# Altium PCB 主控A.PcbDoc
Units mm, origin at the board's own origin, x right, y up, seen from the top; angles counter-clockwise.
Board outline 114 x 43.69 mm, 2 copper layers (Top Layer, Bottom Layer); 97 components, 145 nets, 423 pads, 135 vias.
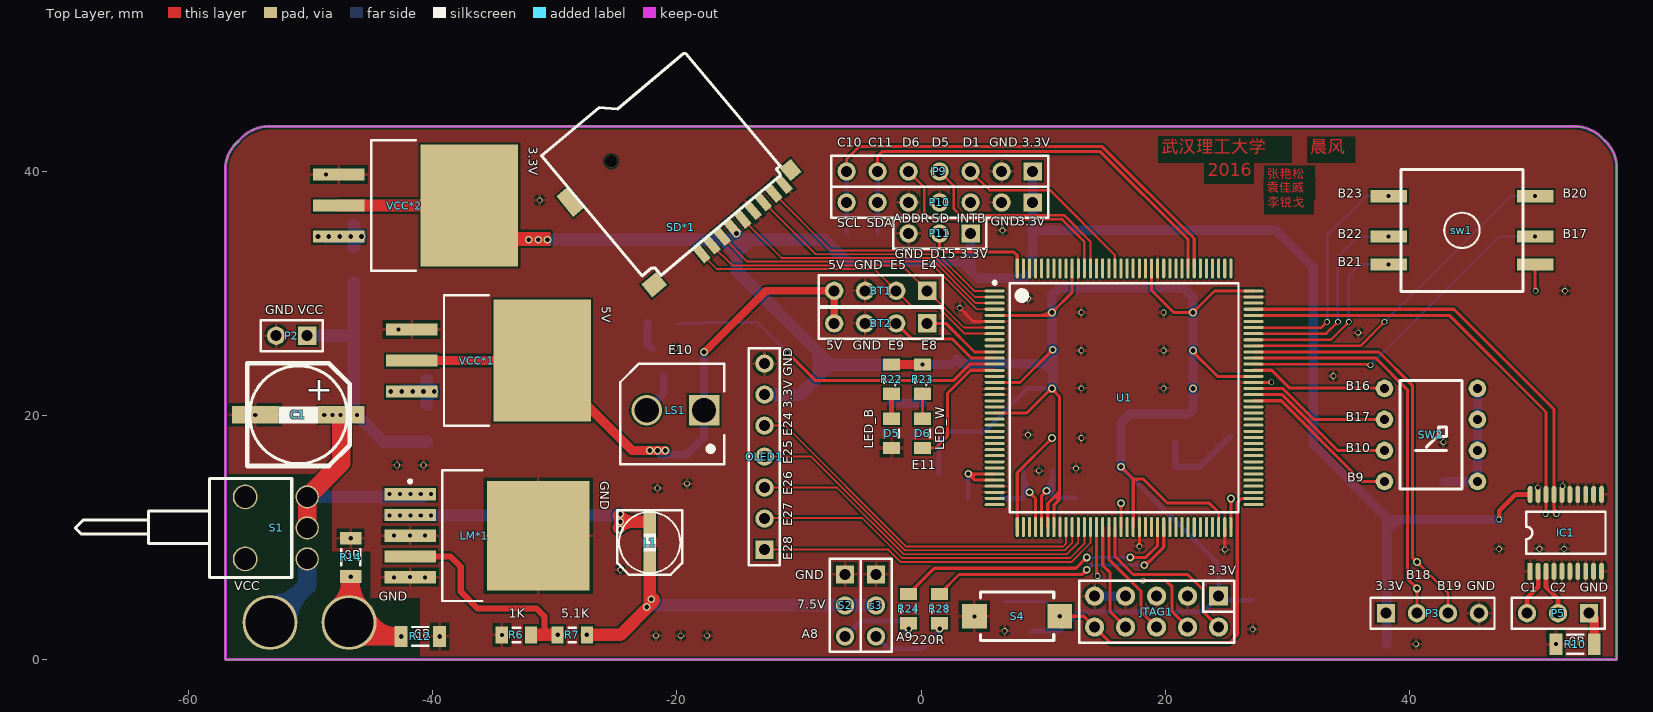
[diagram p0: Top Layer view]
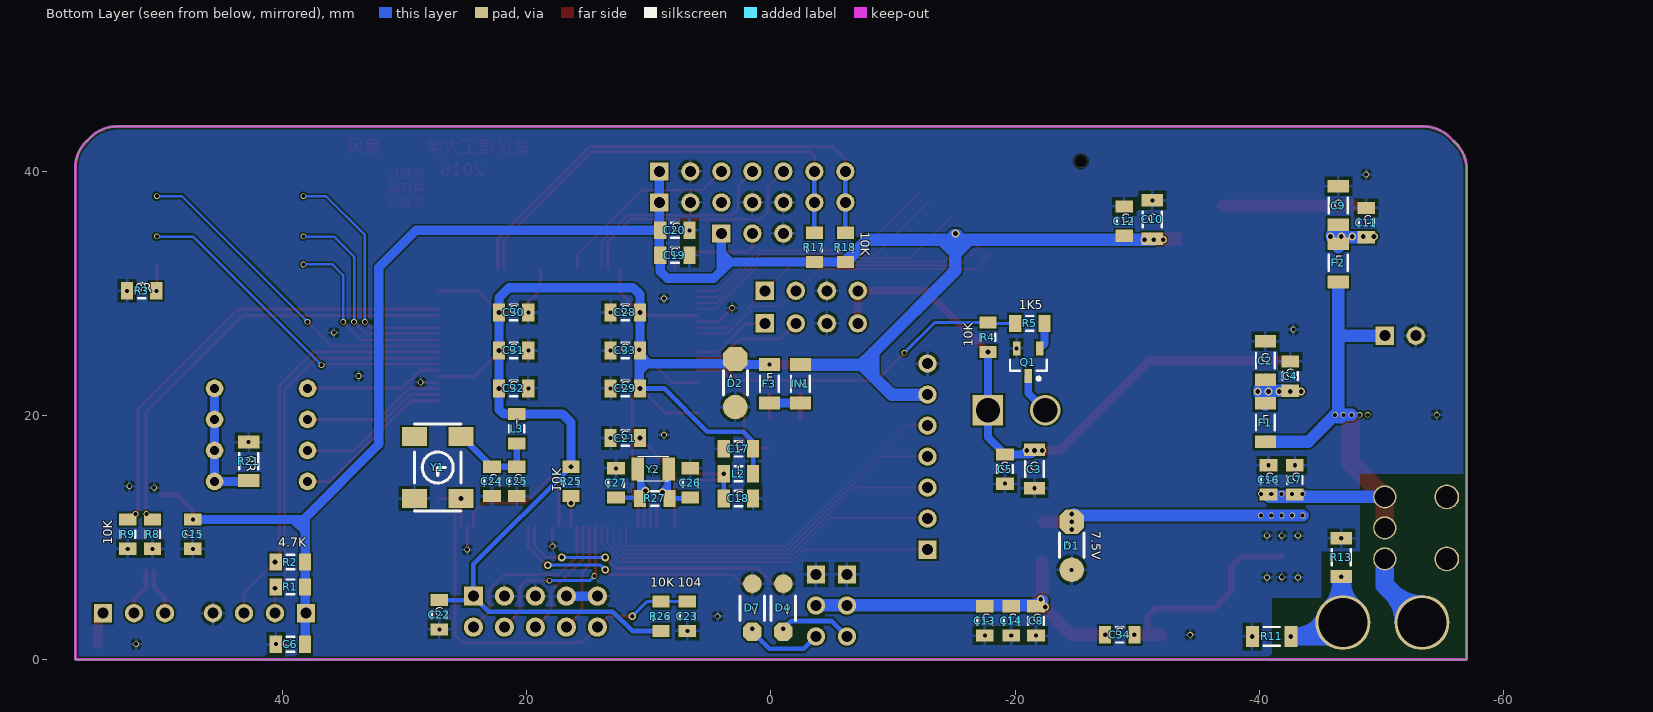
[diagram p1: Bottom Layer view, seen from below]

## Layer stack, top to bottom
Top Layer: signal copper 0.0356
Dielectric: core 0.32, FR-4, Dk 4.8
Bottom Layer: signal copper 0.0356

## Board outline
-57,0 -57,40.155 cw(c-53.934,40.155) -56.102,42.323 -55.635,42.79 cw(c-53.467,40.622) -53.467,43.688 53.594,43.688 cw(c53.594,40.622) 55.762,42.79 56.102,42.45 cw(c53.934,40.282) 57,40.282 57,0

## Design rules (kind name [scope] priority, off if disabled: settings)
Clearance [All] p1: gap=0.152
PolygonConnect [All] p1: connectstyle=Relief reliefconductorwidth=0.254 reliefentries=4 polygonreliefangle="90 Angle" airgapwidth=0.254
RoutingVias [All] p1: holewidth=0.711 width=1.27 viastyle="Through Hole" minholewidth=0.711 minwidth=1.27 maxholewidth=0.711 maxwidth=1.27
SolderMaskExpansion [All] p1: expansion=0.102
Width [All] p1: maxlimit=1.524 minlimit=0.152 preferedwidth=0.254 minimp=50.000000 maximp=50.000000 favimp=50.000000
28 further rules are at their usual default settings.

## Components (designator, comment, footprint, x,y, rotation, side; value= is the part's Value field where it differs from the comment)
BT1 "Header 4" HDR1X4 0.508,30.226 r180 top
BT2 "Header 4" HDR1X4 0.508,27.559 r180 top
C1 "Cap Pol1" SMD-EC-F8 -47.498,20.066 r180 top
C2 "Cap Pol1" 1206(2) -40.513,24.511 r90 bottom
C3 "Cap Pol1" 1206(2) -21.59,15.621 r270 bottom
C4 "Cap" C2012 -42.545,23.241 r270 bottom
C5 "Cap" C2012 -19.177,15.621 r90 bottom
C6 "100nF" C2012 39.37,1.27 r180 bottom
C7 "680UF" c2012 -42.926,14.732 r90 bottom
C8 "220UF" C2012 -21.717,3.175 r270 bottom
C9 "Cap Pol1" 1206(2) -46.482,37.211 r90 bottom
C10 "Cap Pol1" 1206(2) -31.242,36.068 r90 bottom
C11 "Cap" C2012 -48.768,35.814 r270 bottom
C12 "Cap" C2012 -28.956,35.941 r270 bottom
C13 "Cap" C2012 -17.526,3.175 r90 bottom
C14 "Cap" C2012 -19.685,3.175 r90 bottom
C15 "100nF" C2012 47.371,10.287 r270 bottom
C16 "Cap" C2012 -40.767,14.732 r270 bottom
C17 "100nF" C2012 2.667,17.272 r180 bottom
C18 "10nF" C2012 2.667,13.208 r0 bottom
C19 "10uF" C2012 7.874,33.147 r0 bottom
C20 "100nF" C2012 7.874,35.179 r0 bottom
C21 "100nF" c2012 11.938,18.161 r180 bottom
C22 "100nF" R2012 27.178,3.683 r270 bottom
C23 "100nF" C2012 6.858,3.556 r90 bottom
C24 "10nF" C2012 22.86,14.605 r90 bottom
C25 "100nF" C2012 20.828,14.605 r90 bottom
C26 "18pF" C2012 6.604,14.478 r270 bottom
C27 "18pF" C2012 12.7,14.478 r270 bottom
C28 "Cap" C2012 11.938,28.448 r180 bottom
C29 "Cap" C2012 11.938,22.225 r180 bottom
C30 "Cap" C2012 21.082,28.448 r0 bottom
C31 "Cap" C2012 21.082,25.336 r0 bottom
C32 "Cap" C2012 21.082,22.225 r0 bottom
C33 "Cap" C2012 11.938,25.336 r180 bottom
C34 "Cap" C2012 -28.575,2.032 r180 bottom
D1 "1SS355" "hole-chip diode"#1 -25.654,7.366 r90 bottom
D2 "1N4729A" "hole-chip diode"#1 1.905,20.701 r90 bottom
D4 "1N4729A" "hole-chip diode"#2 0,6.223 r270 bottom
D5 "POWER" R2012 -2.413,18.542 r270 top
D6 "POWER" R2012 0.127,18.542 r270 top
D7 "1N4729A" "hole-chip diode"#2 2.54,6.223 r270 bottom
F1 "1.5A" 1206(2) -40.513,19.431 r90 bottom
F2 "500mA" 1206(2) -46.482,32.512 r90 bottom
F3 "300mA" 1206(2) 0.127,22.606 r270 bottom
IC1 "74LVC245" "74LVC245 TSSOP" 49.911,7.239 r90 top
IN1 "1SS355" 1206(2) -2.413,22.606 r270 bottom
JTAG1 "Header 5X2" IDC5X2 19.304,3.937 r180 top
L1 "33uH" SMD-EC-F5 -22.225,7.366 r90 top
L2 "Inductor" C2012 2.667,15.24 r0 bottom
L3 "Inductor" C2012 20.828,18.923 r270 bottom
LM*1 "lm2596" lm2596 -35.56,10.16 r0 top
LS1 "Buzzer" ABSM-1574 -14.224,20.193 r180 top
OLED1 "Header 7" HDR1X7 -12.827,9.017 r90 top
P2 "Header 2" HDR1X2 -50.292,26.543 r180 top
P3 "Header 4" HDR1X4 38.1,3.81 r0 top
P5 "Header 3" HDR1X3 54.737,3.81 r180 top
P9 "Header 7" HDR1X7 9.144,40.005 r180 top
P10 "Header 7" HDR1X7 9.144,37.465 r180 top
P11 "endline" HDR1X3 4.064,34.925 r180 top
Q1 "QNPN" SOT23_N -21.082,24.384 r270 bottom
R1 "Res2" R2012 39.37,5.969 r0 bottom
R2 "Res2" R2012 39.37,8.001 r180 bottom
R3 "10k" R2012 51.562,30.226 r180 bottom
R4 "10k" R2012 -17.78,26.416 r90 bottom
R5 "Res2" R2012 -21.209,27.559 r0 bottom
R6 "Res" R2012 -33.147,2.032 r180 top
R7 "Res" R2012 -28.575,2.032 r180 top
R8 "Res2" R2012 50.673,10.287 r270 bottom
R9 "Res2" R2012 52.705,10.287 r270 bottom
R10 "Res2" 1206(2) 53.594,1.27 r180 top
R11 "Res2" 1206(2) -41.021,1.905 r180 bottom
R12 "Res2" 1206(2) -41.021,1.905 r180 top
R13 "Res2" 1206(2) -46.736,8.382 r270 bottom
R14 "Res2" 1206(2) -46.736,8.382 r270 top
R17 "Res2" R2012 -3.556,33.782 r270 bottom
R18 "Res2" R2012 -6.096,33.782 r270 bottom
R21 "Res2" 1206(2) 42.799,16.256 r270 bottom
R22 "1K" R2012 -2.413,22.987 r90 top
R23 "1K" R2012 0.127,22.987 r90 top
R24 "220R" R2012 -1.016,4.191 r90 top
R25 "10K" R2012 16.383,14.605 r270 bottom
R26 "10K" R2012 9.017,3.556 r270 bottom
R27 "1M" R2012 9.525,13.208 r0 bottom
R28 "220R" R2012 1.524,4.191 r90 top
S1 "small switch" "small switch" -50.292,8.255 r180 top
S2 "Header 3" HDR1X3 -6.223,6.985 r270 top
s3 "Header 3" HDR1X3 -3.683,6.985 r270 top
S4 "SW-PB" SMT_Button 7.874,3.556 r0 top
SD*1 "TF_card" SD_card -20.447,42.672 r310 top
sw1 "SW-5" SW-5 44.323,35.179 r0 top
SW2 "SW DIP-4" switch_4to4 37.973,14.605 r0 top
U1 "K60P144" LQFP144 16.637,21.463 r0 top
VCC*1 "LM1084" "DPAK LM2940" -35.433,24.511 r0 top
VCC*2 "LM1086" "DPAK LM2940" -41.402,37.211 r0 top
Y1 "50MHZ" 贴片有源晶体 29.21,18.288 r270 bottom
Y2 "32.768K" CT3215 8.382,15.621 r0 bottom

## Footprints (in the part's own frame and the unit in brackets; to place one, negate y for a bottom-side part, rotate by r counter-clockwise, add the part's x,y. Pads: shape width x height; smd on the part's side, far side on the other; paste and mask are expansions set on the pad)
"74LVC245 TSSOP" [mm]
  rect 1.4x0.4 smd: 1(0,0)
  oval 1.4x0.4 smd: 2(0,-0.65) 3(0,-1.3) 4(0,-1.95) 5(0,-2.6) 6(0,-3.25) 7(0,-3.9) 8(0,-4.55) 9(0,-5.2) 10(0,-5.85) 11(6.3,-5.85) 12(6.3,-5.2) 13(6.3,-4.55) 14(6.3,-3.9) 15(6.3,-3.25) 16(6.3,-2.6) 17(6.3,-1.95) 18(6.3,-1.3) 19(6.3,-0.65) 20(6.3,0)
  silkscreen extent 1.43,-6.18 4.87,0.33
1206(2) [mm]
  rect 1.05x1.75 smd: 1(-1.575,0) 2(1.575,0)
  silkscreen extent -0.65,-0.77 0.65,0.77, body extent -1.6,-0.8 1.6,0.8, height 1.6
ABSM-1574 [mm] "Magnetic Transducer Buzzer"
  rect 2.5x2.5 hole 2: 1A(3.556,-0.254)
  round 2.5 hole 2: 2A(8.255,-0.254)
  silkscreen extent 1.9,-4.06 10.41,4.19
C2012 [mm] "Chip Capacitor, 2-Leads, Body 2.0x1.2mm, IPC Low Density"
  rect 1x1.45 smd: 1(-1.2,0) 2(1.2,0)
  silkscreen extent -0.3,-0.63 0.3,0.63, body extent -0.98,-0.6 1.02,0.6, height 0.5
c2012 [mm] "Chip Capacitor, 2-Leads, Body 2.0x1.2mm, IPC Low Density"
  rect 1x1.45 smd: 1(-1.2,0) 2(1.2,0)
  silkscreen extent -0.3,-0.63 0.3,0.63, body extent -0.98,-0.6 1.02,0.6, height 0.5
CT3215 [mm]
  rect 1.05x1.85 smd: 1(0,0) 2(2.54,0)
  silkscreen extent 0,-1.02 2.54,1.02
"DPAK LM2940" [mm] "D2-PAK, 4-Pads, Body 7.93x8.69mm (max), IPC Medium Density"
  rect 4.2x1 smd: 1(-6.3,2.54) 2(-6.3,0) 3(-6.3,-2.54)
  rect 8x10 smd: 4(4.4,0)
  silkscreen extent -3.65,-5.35 0,5.35, body extent -3.65,-5.33 6,5.33, height 4.83
HDR1X2 [mm] "Connector; Header; 2 Position"
  rect 1.5x1.5 hole 0.9: 1(0,0)
  round 1.5 hole 0.9: 2(2.54,0)
  silkscreen extent -1.27,-1.27 3.81,1.27
HDR1X3 [mm] "Connector; Header; 3 Position"
  rect 1.5x1.5 hole 0.9: 1(0,0)
  round 1.5 hole 0.9: 2(2.54,0) 3(5.08,0)
  silkscreen extent -1.27,-1.27 6.35,1.27
HDR1X4 [mm] "Connector; Header; 4 Position"
  rect 1.5x1.5 hole 0.9: 1(0,0)
  round 1.5 hole 0.9: 2(2.54,0) 3(5.08,0) 4(7.62,0)
  silkscreen extent -1.27,-1.27 8.89,1.27
HDR1X7 [mm] "Connector; Header; 7 Position"
  rect 1.5x1.5 hole 0.9: 1(0,0)
  round 1.5 hole 0.9: 2(2.54,0) 3(5.08,0) 4(7.62,0) 5(10.16,0) 6(12.7,0) 7(15.24,0)
  silkscreen extent -1.27,-1.27 16.51,1.27
"hole-chip diode"#1 [mm]
  round 2 smd: 1(0,1.016)
  oct 2x2 smd: 2(3.937,1.016)
  silkscreen extent 1,0 3,2
"hole-chip diode"#2 [mm]
  round 1.524 smd: 1(0,1.016)
  oct 1.524x1.524 smd: 2(3.937,1.016)
  silkscreen extent 1,0 3,2
IDC5X2 [mil]
  rect 62x62 hole 35: 1(-200,-50)
  round 62 hole 35: 2(-200,50) 3(-100,-50) 4(-100,50) 5(0,-50) 6(0,50) 7(100,-50) 8(100,50) 9(200,-50) 10(200,50)
  silkscreen extent -250,-100 250,100
lm2596 [mm]
  rect 4.2x1 smd: 1(-6.3,3.4) 2(-6.3,1.7) 3(-6.3,0) 4(-6.3,-1.7) 5(-6.3,-3.4)
  rect 8.4x9 smd: 6(4.2,0)
  silkscreen extent -6.42,-5.35 -0.4,5.35, body extent -3.65,-5.32 6,5.33, height 4.83
LQFP144 [mm]
  oval 1.65x0.25 smd: 1(-10.6,8.75) 2(-10.6,8.25) 3(-10.6,7.75) 4(-10.6,7.25) 5(-10.6,6.75) 6(-10.6,6.25) 7(-10.6,5.75) 8(-10.6,5.25) 9(-10.6,4.75) 10(-10.6,4.25) 11(-10.6,3.75) 12(-10.6,3.25) 13(-10.6,2.75) 14(-10.6,2.25) 15(-10.6,1.75) 16(-10.6,1.25) 17(-10.6,0.75) 18(-10.6,0.25) 19(-10.6,-0.25) 20(-10.6,-0.75) 21(-10.6,-1.25) 22(-10.6,-1.75) 23(-10.6,-2.25) 24(-10.6,-2.75) 25(-10.6,-3.25) 26(-10.6,-3.75) 27(-10.6,-4.25) 28(-10.6,-4.75) 29(-10.6,-5.25) 30(-10.6,-5.75) 31(-10.6,-6.25) 32(-10.6,-6.75) 33(-10.6,-7.25) 34(-10.6,-7.75) 35(-10.6,-8.25) 36(-10.6,-8.75) 73(10.6,-8.75) 74(10.6,-8.25) 75(10.6,-7.75) 76(10.6,-7.25) 77(10.6,-6.75) 78(10.6,-6.25) 79(10.6,-5.75) 80(10.6,-5.25) 81(10.6,-4.75) 82(10.6,-4.25) 83(10.6,-3.75) 84(10.6,-3.25) 85(10.6,-2.75) 86(10.6,-2.25) 87(10.6,-1.75) 88(10.6,-1.25) 89(10.6,-0.75) 90(10.6,-0.25) 91(10.6,0.25) 92(10.6,0.75) 93(10.6,1.25) 94(10.6,1.75) 95(10.6,2.25) 96(10.6,2.75) 97(10.6,3.25) 98(10.6,3.75) 99(10.6,4.25) 100(10.6,4.75) 101(10.6,5.25) 102(10.6,5.75) 103(10.6,6.25) 104(10.6,6.75) 105(10.6,7.25) 106(10.6,7.75) 107(10.6,8.25) 108(10.6,8.75)
  oval 0.25x1.65 smd: 37(-8.75,-10.6) 38(-8.25,-10.6) 39(-7.75,-10.6) 40(-7.25,-10.6) 41(-6.75,-10.6) 42(-6.25,-10.6) 43(-5.75,-10.6) 44(-5.25,-10.6) 45(-4.75,-10.6) 46(-4.25,-10.6) 47(-3.75,-10.6) 48(-3.25,-10.6) 49(-2.75,-10.6) 50(-2.25,-10.6) 51(-1.75,-10.6) 52(-1.25,-10.6) 53(-0.75,-10.6) 54(-0.25,-10.6) 55(0.25,-10.6) 56(0.75,-10.6) 57(1.25,-10.6) 58(1.75,-10.6) 59(2.25,-10.6) 60(2.75,-10.6) 61(3.25,-10.6) 62(3.75,-10.6) 63(4.25,-10.6) 64(4.75,-10.6) 65(5.25,-10.6) 66(5.75,-10.6) 67(6.25,-10.6) 68(6.75,-10.6) 69(7.25,-10.6) 70(7.75,-10.6) 71(8.25,-10.6) 72(8.75,-10.6) 109(8.75,10.6) 110(8.25,10.6) 111(7.75,10.6) 112(7.25,10.6) 113(6.75,10.6) 114(6.25,10.6) 115(5.75,10.6) 116(5.25,10.6) 117(4.75,10.6) 118(4.25,10.6) 119(3.75,10.6) 120(3.25,10.6) 121(2.75,10.6) 122(2.25,10.6) 123(1.75,10.6) 124(1.25,10.6) 125(0.75,10.6) 126(0.25,10.6) 127(-0.25,10.6) 128(-0.75,10.6) 129(-1.25,10.6) 130(-1.75,10.6) 131(-2.25,10.6) 132(-2.75,10.6) 133(-3.25,10.6) 134(-3.75,10.6) 135(-4.25,10.6) 136(-4.75,10.6) 137(-5.25,10.6) 138(-5.75,10.6) 139(-6.25,10.6) 140(-6.75,10.6) 141(-7.25,10.6) 142(-7.75,10.6) 143(-8.25,10.6) 144(-8.75,10.6)
  silkscreen extent -10.72,-9.38 9.38,9.55, body extent -10,-10 10,10, height 1.6
R2012 [mm] "Chip Resistor, 2-Leads, Body 2.0x1.2mm, IPC Low Density"
  rect 1x1.4 smd: 1(-1.2,0) 2(1.2,0)
  silkscreen extent -0.3,-0.6 0.3,0.6, body extent -0.98,-0.6 1.02,0.6, height 0.5
SD_card [mm]
  rect 1.6x0.7 smd: 1(8.732,-4.16) 2(8.732,-3.06) 3(8.732,-1.96) 4(8.732,-0.86) 5(8.732,0.24) 6(8.732,1.34) 7(8.732,2.44) 8(8.732,3.54) 9(8.732,4.64)
  rect 1.4x1.2 smd: 10(8.232,5.84)
  rect 2.2x1.2 smd: 12(-1.368,-9.66)
  rect 1.4x1.6 smd: 13(8.232,-8.76)
  silkscreen extent -5.79,-9.04 8.03,5.43
"small switch" [mil]
  round 80 hole 70: 0(200,0) 0(200,-200)
  round 75 hole 65: 1(0,0) 2(0,-100) 3(0,-200)
  silkscreen extent 50,-260 748,60
SMD-EC-F5 [mm]
  rect 2x1 smd: 1(0.635,0) 2(3.81,0)
  silkscreen extent -0.41,-2.65 4.89,2.66
SMD-EC-F8 [mm]
  rect 3.8x1.4 smd: 1(0,0) 2(7.051,0)
  silkscreen extent -0.69,-4.22 7.71,4.2
SMT_Button [mil]
  rect 80x80 smd: 1(-137.8,0) 2(137.8,0)
  silkscreen extent -118,-79 118,79
SOT23_N [mm] "SOT23, 3-Leads, Body 2.9x1.3mm, Pitch 0.95mm, Lead Span 2.3mm - Reverse Pinning, IPC Medium Density"
  rect 1.15x0.6 smd: 1(1.125,0) 2(-1.125,-0.95) 3(-1.125,0.95)
  silkscreen extent -0.2,-1.5 1.47,1.5, body extent -0.7,-1.5 0.7,1.5, height 1.1
SW-5 [mm]
  rect 3x1 smd: 1(-6,2.8) 2(-6,-0.5) 3(-6,-2.8) 4(6,-2.8) 5(6,-0.5) 6(6,2.8)
  silkscreen extent -5,-5 5,5
switch_4to4 [mil]
  round 57 hole 30: 1(0,300) 2(0,200) 3(0,100) 4(0,0) 5(300,0) 6(300,100) 7(300,200) 8(300,300)
  silkscreen extent 50,-25 250,325
贴片有源晶体 [mil]
  rect 60x80 smd: 1(0,0) 2(200,0) 3(200,150) 4(0,150)
  silkscreen extent -40,0 240,150, body extent -37,-23 238,173, height 74

## Part data
BT1 BT2 P3: "Header, 4-Pin"
C1 C2 C3 C9 C10: "Polarized Capacitor (Radial)"
C4 C5 C11 C12 C28 C29 C30 C31 C32 C33: "贴片电容"
C6 C15 C17 C18 C19 C20 C21 C22 C23 C24 C25: library part Cap, "Capacitor"
C7 C8: library part CAP+
C13 C14 C16 C34: "Capacitor"
C26 C27: library part 陶瓷电容, "CAP"
D1 D2 D4 D7 IN1: library part "Diode 1N4148", "High Conductance Fast Diode"
D5 D6: library part LED, "Typical INFRARED GaAs LED"
F1 F2 F3: library part "Fuse 1", "Fuse"
JTAG1: "Header, 5-Pin, Dual row"
L1: library part Inductor, "Inductor"
LS1: "Magnetic Transducer Buzzer"
OLED1 P9 P10: "Header, 7-Pin"
P2: "Header, 2-Pin"
P5 S2 s3: "Header, 3-Pin"
P11: library part "Header 3", "Header, 3-Pin"
Q1: "NPN Bipolar Transistor"
R1 R2 R5 R8 R9 R10 R11 R12 R13 R14 R17 R18 R21: "Resistor"
R3 R4: library part Res, "Resistor of led"
R6 R7: "贴片电阻"
R22 R23 R24 R25 R26 R27 R28: library part Res, "Resistor"
S4: "Switch"
SW2: "DIP Switch, 4 Position, SPST"
VCC*1: library part LM1086
Y1: library part XTAL1
Y2: library part XTAL, "Crystal Oscillator"

## Free pads (board coordinates)
  round 4.5 hole 4: 0(-53.34,3.048) 1(-46.863,3.048)

## Via types
v1: diameter 0.457, hole 0.33, Top Layer to Bottom Layer, 83 vias
v2: diameter 0.635, hole 0.381, Top Layer to Bottom Layer, 51 vias
v3: diameter 1, hole 1, Top Layer to Bottom Layer, 1 vias

## Nets (pads, with @x,y where several pads share a name; then routed paths per layer and width w, separated by ;. In a path a pad name is that pad's centre, name@x,y a point inside that pad or via, vN(x,y) a via of type N, cw(c..) or ccw(c..) an arc to the next point about the centre after c; other vN are vias at no path point)
3.3V: C6.2 C10.1 C12.2 C15.1 C19.2 C20.2 IC1.20 IN1.1 OLED1.6 P3.1 P9.1 P10.1 P11.1 R1.1 R2.2 R17.2 R18.2 SD*1.4 VCC*2.2 VCC*2.4 | length 169.6
  Top Layer w0.381: v1(47.371,11.487) 47.371,12.192 48.718,13.539 IC1.20
  Top Layer w1.016: VCC*2.2 VCC*2.4
  Bottom Layer w0.762: R18.2 R17.2 3.359,32.582 ; P11.1 4.064,33.287 ; C19.2 9.074,31.807 8.509,31.242 4.699,31.242 4.064,31.877 ; C20.2 C20.2@9.144,35.179 ; C19.2@9.144,33.217 C20.2@9.144,35.179 ; P9.1 P10.1 C20.2@9.144,35.179 ; C6.2 R1.1 R2.2 38.17,10.541 ; v1(47.371,11.487) 39.116,11.487 ; 3.359,32.582 3.994,32.582 4.064,32.512 ; 3.359,32.582 4.064,33.287 ; 3.359,32.582 4.064,31.877 ; 4.064,31.877 4.064,32.512 ; 4.064,32.512 4.064,33.287 ; C20.2@9.144,35.179 29.083,35.179 32.131,32.131 32.131,17.653 38.17,11.614 38.17,11.487 ; 38.17,10.541 38.17,11.487 ; 38.17,10.541 39.116,11.487 ; 38.17,11.487 39.116,11.487
  Bottom Layer w1.016: v2(-31.369,34.417) v2(-30.607,34.417) -16.256,34.417 ; -15.88,34.417 ccw(c-15.88,35.692) v2@-14.978,34.79 ; v2@-15.248,34.79 ccw(c-14.346,35.692) -14.346,34.417 ; OLED1.6 -9.881,21.717 -8.382,23.216 ; R18.2 -7.931,34.417 -13.97,34.417 ; IN1.1 -7.417,24.181 ; -16.256,34.417 -15.113,34.417 ; -16.256,34.417 -15.113,33.274 ; -15.113,33.274 -15.113,31.877 -8.382,25.146 ; -15.113,33.274 -15.113,34.417 ; -15.113,33.274 -13.97,34.417 ; -15.113,34.417 -13.97,34.417 ; -8.382,23.216 -7.417,24.181 ; -8.382,23.216 -8.382,25.146 ; -8.382,25.146 -7.417,24.181
  other v2: -32.131,34.417 -15.113,34.925
5V: BT1.4 BT2.4 C3.1 C5.2 LS1.1A R4.1 VCC*1.2 VCC*1.4 | length 54.3
  Top Layer w0.635: v2(-17.78,25.216) -17.71,25.216 -12.7,30.226 BT1.4 BT2.4
  Top Layer w0.762: VCC*1.2 VCC*1.4 -23.667,17.145 v2(-20.955,17.145)
  Bottom Layer w0.635: C3.1@-21.434,17.054 ccw(c-21.247,17.374) v2(-20.955,17.145) ; C3.1@-20.808,16.821 cw(c-20.808,17.927) v2(-21.59,17.145) ccw(c-21.215,17.2) C3.1@-21.215,16.821 ; -20.173,16.821 cw(c-20.173,17.927) v2(-20.955,17.145) ; v2(-17.78,25.216) LS1.1A -17.78,18.218 C5.2 C3.1@-21.215,16.821 ; C3.1@-21.215,16.821 C3.1 ccw(c-21.243,17.543) v2(-20.955,17.145)
  other v2: -22.225,17.145
"ADC0 SE16": U1.36
"ADC1 SE16": U1.35
CLK: P9.7 P10.7 R18.1 U1.115 | length 40.5
  Top Layer w0.254: P9.7 -6.096,41.021 -5.08,42.037 14.859,42.037 22.387,34.509 U1.115
  Bottom Layer w0.381: R18.1 P10.7 P9.7
DAC0: U1.38
DAC1: U1.39
EGND: pad.1 R11.2 R12.2 R13.2 R14.2 | length 28.4
  Top Layer w1.524: pad.1@-47.811,4.195 ccw(c-49.695,6.477) -46.736,6.477 pad.1@-46.736,3.175 ; R14.2@-46.736,6.334 ccw(c-43.577,6.334) pad.1@-45.811,4.1 ; pad.1@-45.72,1.905 -43.053,1.905 cw(c-43.053,4.491) pad.1@-45.471,3.575
  Bottom Layer w1.524: pad.1@-47.811,4.195 ccw(c-49.695,6.477) -46.736,6.477 pad.1@-46.736,3.175 ; R13.2@-46.736,6.334 ccw(c-43.577,6.334) pad.1@-45.811,4.1 ; pad.1@-45.72,1.905 -43.053,1.905 cw(c-43.053,4.491) pad.1@-45.471,3.575
  other v2: -42.596,1.905 -46.736,6.807
EZP_CS: R25.2 U1.54 | length 2.7
  Top Layer w0.254: v2@16.248,12.692 cw(c15.913,12.357) 16.387,12.357 ; U1.54 v2@16.387,12.823 ; 16.387,12.377 cw(c16.833,12.377) v2@16.518,12.692
  other v2: 16.383,12.827
FB: C34.2 LM*1.4 R6.1 R7.2 | length 17.9
  Top Layer w0.508: LM*1.4 -38.559,8.46 -37.719,7.62 -37.719,5.588 -36.322,4.191 -31.496,4.191 -30.861,3.556 -30.861,2.032
  Top Layer w1.016: R6.1 -30.861,2.032 v2(-29.775,2.032)
GND: BT1.3 BT2.3 C1.2 C2.2 C3.2 C4.1 C5.1 C6.1 C7.2 C8.2 C9.2 C10.2 C11.1 C12.1 C13.1 C14.1 C15.2 C16.1 C17.1 C18.1 C19.1 C20.1 C21.1 C22.2 C23.1 C24.1 C25.1 C26.1 C27.1 C28.1 C29.1 C30.1 C31.1 C32.1 C33.1 D1.1 D2.1 D4.1 D5.2 D7.1 IC1.1 IC1.4 IC1.5 IC1.6 IC1.7 IC1.8 IC1.9 IC1.10 IC1.11 IC1.12 IC1.13 IC1.14 IC1.15 IC1.16 IC1.19 JTAG1.3 JTAG1.5 JTAG1.7 JTAG1.9 LM*1.3 LM*1.5 LM*1.6 OLED1.7 P2.2 P3.4 P9.2 P10.2 P10.4 P10.5 P11.3 Q1.2 R3.1 R6.2 R8.2 R9.2 R10.2 R11.1 R12.1 R13.1 R14.1 R21.1 S2.1 s3.1 S4.1 SD*1.6 SD*1.9 U1.6 U1.17 U1.18 U1.33 U1.34 U1.44 U1.57 U1.71 U1.93 U1.107 U1.121 U1.134 VCC*1.1 VCC*2.1 Y1.2 | length 12.1
  Top Layer w0.254: v1@3.175,28.727 cw(c3.175,28.482) 3.348,28.656 cw(c3.522,28.829) v1@3.277,28.829 ; v1(3.175,28.829) 4.291,27.713 U1.6 ; v1@17.815,9.363 ccw(c17.642,9.536) 17.887,9.536 ccw(c18.132,9.536) v1@17.959,9.363 ; v1(17.887,9.291) U1.57 ; v1@24.82,9.089 ccw(c24.659,9.25) 24.887,9.25 ; v1@24.887,9.022 U1.71 ; 24.887,9.274 ccw(c25.149,9.274) v1@24.964,9.089 ; U1.93 v1@28.682,22.713 ; 28.408,22.713 ccw(c28.408,23.027) v1@28.63,22.805
  Bottom Layer w0.762: JTAG1.9 JTAG1.7
  other v1: 40.57,1.27 52.019,1.27 -21.717,1.975 -19.685,1.975 -17.526,1.975 -34.347,2.032 6.858,2.356 27.178,2.483 4.374,3.556 -43.18,6.731 -40.64,6.731 -41.86,6.76 -24.638,7.366 24.892,9.017 47.371,9.087 50.673,9.087 52.705,9.087 -43.18,10.16 -41.86,10.16 -40.64,10.16 -21.59,14.046 50.546,14.097 52.578,14.224 -19.177,14.421 9.652,15.494 12.7,15.678 -42.926,15.932 -40.767,15.932 42.799,17.831 13.138,18.161 8.763,18.415 -54.549,20.066 13.138,22.225 19.882,22.225 28.702,22.733 33.782,23.241 13.138,25.336 19.882,25.336 -20.132,25.509 35.814,26.797 -42.799,27.051 13.138,28.448 19.882,28.448 8.763,29.591 52.762,30.226 6.674,35.179 -31.242,37.643 -48.768,39.751
  other v2: -39.446,1.905 -46.736,9.957
K3.3V: C17.2 C22.1 C28.2 C29.2 C30.2 C31.2 C32.2 C33.2 D2.2 F3.1 JTAG1.1 L2.1 L3.1 R22.2 R23.2 R25.1 R26.2 U1.5 U1.16 U1.21 U1.42 U1.43 U1.56 U1.70 U1.94 U1.108 U1.122 U1.135 | length 177.7
  Top Layer w0.254: U1.21 8.656,20.213 10.668,22.225 11.335,21.558 11.335,13.748 ; U1.16 8.108,22.713 v2(10.795,25.4) ; U1.5 10.503,28.213 ; 9.711,28.213 ccw(c9.711,29.475) v2@10.603,28.583 ; 10.293,21.85 cw(c10.738,21.406) 10.738,22.035 cw(c10.738,21.744) 10.944,21.949 ; 10.324,28.213 ccw(c10.324,28.862) v2@10.783,28.403 ; U1.42 10.387,12.8 10.922,13.335 ; 10.462,22.019 ccw(c10.257,22.225) v2@10.547,22.225 ; v2@10.554,28.4 cw(c10.365,28.351) 10.503,28.213 ; v2@10.604,25.4 cw(c10.145,25.4) 10.47,25.075 cw(c10.795,24.75) v2@10.795,25.209 ; v2@10.69,28.264 ccw(c10.641,28.075) 10.503,28.213 ; v2@10.738,28.638 ccw(c10.738,29.098) 11.063,28.773 ccw(c11.388,28.448) v2@10.928,28.448 ; U1.43 10.887,12.665 11.335,13.113 ; v2@10.928,22.225 ccw(c11.557,22.225) 11.113,21.78 ; U1.135 12.387,30.097 v2(10.738,28.448) 10.503,28.213 ; v2@16.383,15.615 cw(c16.383,15.155) 16.708,15.48 cw(c17.033,15.805) v2@16.573,15.805 ; v2(16.383,15.805) 17.387,14.801 ; U1.56 17.387,14.801 ; 17.653,14.744 17.653,14.801 ; U1.122 18.887,30.262 20.701,28.448 v2(22.282,28.448) 24.047,30.213 U1.108 ; v2@22.147,28.313 ccw(c21.822,27.988) 21.822,28.448 ccw(c21.822,28.908) v2@22.147,28.583 ; v2(22.282,25.336) 22.225,25.279 24.292,23.213 U1.94 ; v2@22.282,28.639 ccw(c22.282,29.098) 22.607,28.773 ccw(c22.932,28.448) v2@22.473,28.448 ; v2@22.473,25.336 ccw(c23.208,25.336) 22.688,24.817 ; U1.70 24.387,12.062 23.622,12.827 20.193,12.827 18.219,14.801 17.653,14.801 ; 10.922,13.335 11.128,13.335 ; 10.922,13.335 11.335,13.748 ; 11.128,13.335 11.335,13.335 ; 11.128,13.335 11.128,13.319 11.335,13.113 ; 11.335,13.113 11.335,13.335 ; 11.335,13.335 11.335,13.748 ; 17.387,14.801 17.653,14.801
  Top Layer w0.762: R22.2 R23.2
  Bottom Layer w0.381: L2.1 C17.2 1.467,17.85 2.286,18.669 5.207,18.669 8.763,22.225 v2(10.738,22.225) ; R26.2 11.373,2.356 12.954,3.937 23.114,3.937 JTAG1.1 ; v2(16.383,15.805) 24.384,7.804 JTAG1.1 ; C22.1 24.708,4.883 JTAG1.1
  Bottom Layer w0.762: v1(0.127,24.181) D2.2@2.464,24.181 ; D2.2 3.302,24.257 10.033,24.257 ; C33.2@10.634,24.858 ccw(c10.092,25.4) C33.2@10.858,25.4 ; C29.2@10.795,22.282 10.795,23.622 ; v2(10.795,25.4) 10.795,23.622 ; C33.2@10.856,25.417 cw(c10.41,25.29) C33.2@10.738,24.962 ; v2(16.383,15.805) 16.383,19.431 17.075,20.123 L3.1 21.901,20.123 22.282,20.504 v2(22.282,22.225) v2(22.282,25.336) v2(22.282,28.448) 22.282,29.661 21.463,30.48 11.303,30.48 10.738,29.915 v2(10.738,28.448) C33.2@10.738,24.962 ; C33.2@10.738,24.962 10.096,24.32 10.795,23.622
NetC2_1: C2.1 C4.2 F1.2 VCC*1.3 | length 6.5
  Bottom Layer w1.016: C4.2 v2@-40.57,22.041 ; F1.2@-40.513,20.898 cw(c-38.805,20.898) v2@-40.013,22.106 ; F1.2 C2.1 ccw(c-39.053,22.936) v2@-40.002,21.826
  other v2: -43.434,21.971 -42.545,21.971 -41.656,21.971 -40.767,21.971 -39.878,21.971
NetC9_1: C9.1 C11.2 F2.2 VCC*2.3 | length 5.8
  Bottom Layer w1.016: C11.2 v2@-47.009,34.614 ; F2.2@-46.482,33.808 cw(c-45.232,33.808) v2@-45.958,34.826 ; F2.2 C9.1 ccw(c-45.022,35.636) F2.2@-45.971,34.526
  other v2: -49.403,34.671 -48.514,34.671 -47.625,34.671 -46.736,34.671 -45.847,34.671
NetC18_2: C18.2 L2.2 U1.31 U1.32 | length 8.3
  Top Layer w0.254: v2@3.867,15.05 cw(c3.867,14.59) 4.192,14.915 cw(c4.517,15.24) v2@4.058,15.24 ; v2@4.002,15.105 cw(c4.262,14.845) 4.262,15.213 ; v2@4.002,15.375 ccw(c4.392,15.765) 4.392,15.213 ; 4.191,14.959 4.445,15.213 ; U1.32 4.394,14.713 3.894,15.213 4.445,15.213 ; U1.31 4.445,15.213
  Bottom Layer w0.381: C18.2 v2(3.867,15.24)
NetC21_2: C21.2 U1.37 | length 9.2
  Top Layer w0.254: U1.37 7.887,15.31 v2(10.738,18.161) ; v2@10.547,18.161 cw(c10.088,18.161) 10.413,17.836 cw(c10.738,17.511) v2@10.738,17.97
NetC24_2: C24.2 C25.2 L3.2 Y1.4 | length 7.5
  Bottom Layer w0.508: L3.2 C25.2 C24.2 25.343,18.288 Y1.4
NetC26_2: C26.2 R27.1 U1.40 Y2.1 | length 11.3
  Top Layer w0.254: v2@8.89,13.525 cw(c8.89,13.066) 9.215,13.391 cw(c9.54,13.716) v2@9.08,13.716 ; v2(8.89,13.716) 9.387,13.219 U1.40
  Bottom Layer w0.381: C26.2@6.604,13.405 6.801,13.208 8.382,13.208 Y2.1 ; R27.1@8.382,13.429 cw(c8.926,13.429) v2@8.859,13.968 ; 8.382,14.329 ccw(c9.503,14.329) R27.1@8.71,13.536 ; Y2.1@8.382,15.249 ccw(c10.423,15.249) v2@8.98,13.806
NetC27_2: C27.2 R27.2 U1.41 Y2.2 | length 11.3
  Top Layer w0.254: U1.41 9.887,13.443 v2(10.287,13.843) ; v2@10.096,13.843 cw(c9.637,13.843) 9.962,13.518 cw(c10.287,13.193) v2@10.287,13.652
  Bottom Layer w0.381: v2@10.197,13.933 ccw(c8.754,15.376) Y2.2@10.795,15.376 ; v2@10.332,14.093 cw(c10.232,13.539) R27.2@10.795,13.539 ; R27.2@10.467,13.663 ccw(c9.674,14.456) 10.795,14.456 ; Y2.2@10.795,15.494 10.795,13.278 C27.2
NetD1_2: D1.2 L1.2 LM*1.2 | length 25.7
  Top Layer w1.016: v2@-24.773,10.803 cw(c-23.565,9.595) -23.565,11.303 cw(c-23.565,13.011) v2@-24.773,11.803 ; v2(-24.638,11.303) L1.2@-22.352,11.303
  Bottom Layer w1.016: v1(-43.561,11.811) v1(-42.704,11.811) v1(-41.846,11.811) v1(-40.989,11.811) v1(-40.132,11.811) -25.146,11.811 cw(c-25.146,11.055) D1.2@-24.467,11.386 ; D1.2@-25.405,11.811 cw(c-25.405,10.536) D1.2@-24.503,11.438 ; D1.2@-24.826,11.907 ccw(c-24.173,12.015) D1.2@-24.558,11.477
  other v2: -24.638,10.668 -24.638,11.938
NetD4_2: D4.2 R24.1 S2.3 | length 7.2
  Bottom Layer w0.381: S2.3 -4.953,3.175 -1.651,3.175 v2(-1.016,2.54) ; D4.2@-1.143,2.537 cw(c-2.011,2.519) -1.397,1.905 D4.2
NetD5_1: D5.1 R22.1 | length 2
  Top Layer w0.381: D5.1 R22.1
NetD6_1: D6.1 R23.1 | length 2
  Top Layer w0.254: D6.1 R23.1
NetD7_2: D7.2 R28.1 s3.3 | length 6.9
  Bottom Layer w0.381: s3.3 -2.667,0.889 0.127,0.889 D7.2 ; D7.2@1.128,1.89 ccw(c0.477,2.54) D7.2@1.397,2.54
  other v2: 1.524,2.54
NetF3_2: F3.2 IN1.2 | length 2.5
  Bottom Layer w0.762: IN1.2 F3.2
NetIC1_2: IC1.2 P5.3 | length 3.8
  Top Layer w0.381: P5.3 49.657,5.08 50.561,5.984 IC1.2
NetIC1_3: IC1.3 P5.2 | length 3.8
  Top Layer w0.381: IC1.3 51.211,5.939 52.197,4.953 P5.2
NetLS1_2: LS1.2A Q1.1 | length 3.4
  Bottom Layer w0.635: LS1.2A -21.082,21.844 Q1.1
NetP5_1: P5.1 R10.1 | length 2.7
  Top Layer w0.762: P5.1 55.169,3.378 R10.1
NetQ1_2: Q1.3 R5.1 | length 2.2
  Bottom Layer w0.635: R5.1 -22.409,25.886 Q1.3
NetR3_2: R3.2 sw1.4 | length 2.4
  Top Layer w0.254: v1@50.323,30.265 sw1.4 ; 50.323,30.565 ccw(c50.701,30.565) v1@50.434,30.298
  other v1: 50.362,30.226
NetR21_2: R21.2 SW2.5 SW2.6 SW2.7 SW2.8 | length 10.3
  Bottom Layer w0.762: R21.2@42.875,14.605 SW2.5 SW2.6 SW2.7 SW2.8
OLEDCLK: OLED1.5 U1.45 | length 30.3
  Top Layer w0.152: OLED1.5 -11.103,19.177 -1.197,9.271 11.633,9.271 11.887,9.525 U1.45
OLEDCS: OLED1.1 U1.49 | length 29.1
  Top Layer w0.152: OLED1.1 -2.667,9.017 -1.651,8.001 12.319,8.001 13.887,9.569 U1.49
OLEDDC: OLED1.2 U1.48 | length 29.4
  Top Layer w0.152: OLED1.2 -12.776,11.608 -4.827,11.608 -1.55,8.331 12.218,8.331 13.387,9.5 U1.48
OLEDMISO: OLED1.4 U1.46 | length 29.9
  Top Layer w0.152: OLED1.4 -8.994,16.637 -1.323,8.966 11.76,8.966 12.387,9.593 U1.46
OLEDRST: OLED1.3 U1.47 | length 29.6
  Top Layer w0.152: OLED1.3 -6.885,14.097 -1.424,8.636 11.938,8.636 12.887,9.585 U1.47
"PGA0 DM": U1.28
"PGA0 PM": U1.27
"PGA1 DM": U1.30
"PGA1 PM": U1.29
"PGA2 DM": U1.24
"PGA2 DP": U1.23
"PGA3 DM": U1.26
"PGA3 PM": U1.25
PTA5: U1.55
PTA6: U1.58
PTA7: U1.59
PTA8: R24.2 U1.60 | length 26.4
  Top Layer w0.254: R24.2 1.086,7.493 12.7,7.493 v2(13.589,8.382) ; v2@13.399,8.382 cw(c12.939,8.382) 13.264,8.057 cw(c13.589,7.732) v2@13.589,8.191 ; v2(17.145,8.382) 18.415,8.382 19.387,9.354 U1.60 ; v2@17.28,8.247 cw(c17.605,7.922) 17.605,8.382 cw(c17.605,8.842) v2@17.28,8.517
  Bottom Layer w0.254: v2(13.589,8.382) v2(17.145,8.382) ; v2@13.724,8.247 cw(c14.049,7.922) 14.049,8.382 cw(c14.049,8.842) v2@13.724,8.517 ; v2@17.01,8.247 ccw(c16.685,7.922) 16.685,8.382 ccw(c16.685,8.842) v2@17.01,8.517
PTA9: R28.2 U1.61 | length 24.4
  Top Layer w0.254: R28.2 3.118,6.985 13.208,6.985 v2(13.589,7.366) ; v2@13.399,7.366 cw(c12.939,7.366) 13.264,7.041 cw(c13.589,6.716) v2@13.589,7.175 ; v2(18.288,7.747) 18.415,7.747 19.887,9.219 U1.61 ; v2@18.288,7.938 ccw(c18.288,8.704) 18.83,8.162
  Bottom Layer w0.254: v2(13.589,7.366) 13.97,7.747 v2(18.288,7.747) ; v2@13.589,7.556 ccw(c13.589,8.016) 13.914,7.691 ccw(c14.239,7.366) v2@13.779,7.366 ; v2@18.153,7.612 ccw(c17.828,7.287) 17.828,7.747 ccw(c17.828,8.207) v2@18.153,7.882
PTA10: U1.62
PTA11: U1.63
PTA12: U1.64
PTA13: U1.65
PTA14: U1.66
PTA15: U1.67
PTA16: U1.68
PTA17: U1.69
PTA18: U1.72 Y1.3 | length 3.1
  Top Layer w0.254: v2@25.265,13.073 cw(c24.971,12.779) 25.387,12.779 ; U1.72 v2@25.387,13.195 ; 25.387,12.717 cw(c25.891,12.717) v2@25.535,13.073
  other v2: 25.4,13.208
PTA19: U1.73
PTA24: U1.75
PTA25: U1.76
PTA26: U1.77
PTA27: U1.78
PTA28: U1.79
PTA29: U1.80
PTB0: U1.81
PTB1: U1.82
PTB2: U1.83
PTB3: U1.84
PTB4: U1.85
PTB5: U1.86
PTB6: U1.87
PTB7: U1.88
PTB8: U1.89
PTB9: SW2.4 U1.90 | length 13.5
  Top Layer w0.254: U1.90 29.514,21.213 36.122,14.605 SW2.4 SW2.4@37.9,14.605
PTB10: SW2.3 U1.91 | length 12.6
  Top Layer w0.254: U1.91 29.589,21.713 34.157,17.145 SW2.3
PTB11: SW2.2 U1.92 | length 11.8
  Top Layer w0.254: U1.92 29.663,22.213 32.191,19.685 SW2.2
PTB16: SW2.1 U1.95 | length 11.3
  Top Layer w0.254: U1.95 28.738,23.713 30.201,22.25 SW2.1@37.948,22.25
PTB17: sw1.5 U1.96 | length 28.9
  Top Layer w0.203: U1.96 36.747,24.213 v1(36.83,24.13) ; 36.323,24.213 cw(c36.323,23.623) v1@36.74,24.04
  Bottom Layer w0.203: v1(36.83,24.13) 47.371,34.671 v1@50.292,34.671 ; v1@36.83,24.257 ccw(c36.83,24.564) 37.047,24.347 ccw(c37.264,24.13) v1@36.957,24.13 ; 49.997,34.671 ccw(c49.997,35.005) v1@50.233,34.769 ; 50.036,34.671 cw(c50.036,34.392) v1@50.233,34.589
  other v1: 50.323,34.679
PTB18: P3.2 R1.2 U1.97 | length 33.8
  Top Layer w0.254: U1.97 37.263,24.713 39.853,22.123 39.853,6.629 v2(40.64,5.842) P3.2 ; v2@40.45,5.842 ccw(c39.99,5.842) 40.315,6.167 ccw(c40.64,6.492) v2@40.64,6.032 ; v2@40.505,5.707 cw(c40.18,5.382) 40.64,5.382 cw(c41.1,5.382) v2@40.775,5.707
PTB19: P3.3 R2.1 U1.98 | length 35.5
  Top Layer w0.254: U1.98 37.525,25.213 40.259,22.479 40.259,8.382 v2(40.64,8.001) 43.18,5.461 P3.3 ; v2@40.45,8.001 ccw(c39.99,8.001) 40.315,8.326 ccw(c40.64,8.651) v2@40.64,8.191 ; v2@40.64,7.81 cw(c40.64,7.351) 40.965,7.676 cw(c41.29,8.001) v2@40.831,8.001
PTB20: sw1.6 U1.99 | length 29.6
  Top Layer w0.203: U1.99 36,25.713 v1(37.973,27.686) ; v1@37.846,27.686 cw(c37.539,27.686) 37.756,27.469 cw(c37.973,27.252) v1@37.973,27.559
  Bottom Layer w0.203: v1(37.973,27.686) 48.26,37.973 v1@50.323,37.973 ; v1@37.973,27.813 ccw(c37.973,28.12) 38.19,27.903 ccw(c38.407,27.686) v1@38.1,27.686 ; 50.002,37.973 ccw(c50.002,38.3) v1@50.233,38.069 ; 50.031,37.973 cw(c50.031,37.687) v1@50.233,37.889
  other v1: 50.323,37.979
PTB21: sw1.3 U1.100 | length 17.3
  Top Layer w0.203: U1.100 33.579,26.213 v1(35.052,27.686) ; v1@34.925,27.686 cw(c34.618,27.686) 34.835,27.469 cw(c35.052,27.252) v1@35.052,27.559
  Bottom Layer w0.203: v1@34.962,27.776 ccw(c34.745,27.993) 35.052,27.993 ccw(c35.359,27.993) v1@35.142,27.776 ; v1(35.052,27.686) 35.052,31.496 35.941,32.385 v1@38.323,32.385 ; 38.002,32.385 cw(c38.002,32.058) v1@38.233,32.289 ; 38.031,32.385 ccw(c38.031,32.671) v1@38.233,32.469
  other v1: 38.323,32.379
PTB22: sw1.2 U1.101 | length 19
  Top Layer w0.203: U1.101 33.19,26.713 v1(34.163,27.686) ; v1@34.036,27.686 cw(c33.729,27.686) 33.946,27.469 cw(c34.163,27.252) v1@34.163,27.559
  Bottom Layer w0.203: v1@34.073,27.776 ccw(c33.856,27.993) 34.163,27.993 ccw(c34.47,27.993) v1@34.253,27.776 ; v1(34.163,27.686) 34.163,33.02 35.814,34.671 v1@38.323,34.671 ; 37.997,34.671 ccw(c37.997,35.005) v1@38.233,34.769 ; 38.036,34.671 cw(c38.036,34.392) v1@38.233,34.589
  other v1: 38.323,34.679
PTB23: sw1.1 U1.102 | length 21.2
  Top Layer w0.203: U1.102 32.801,27.213 v1(33.274,27.686) ; v1@33.147,27.686 cw(c32.84,27.686) 33.057,27.469 cw(c33.274,27.252) v1@33.274,27.559
  Bottom Layer w0.203: v1@33.184,27.776 ccw(c32.967,27.993) 33.274,27.993 ccw(c33.581,27.993) v1@33.364,27.776 ; v1(33.274,27.686) 33.274,34.798 36.449,37.973 v1@38.323,37.973 ; 38.002,37.973 ccw(c38.002,38.3) v1@38.233,38.069 ; 38.031,37.973 cw(c38.031,37.687) v1@38.233,37.889
  other v1: 38.323,37.979
PTC0: U1.103
PTC1: IC1.18 R8.1 U1.104 | length 35.9
  Top Layer w0.254: U1.104 43.288,28.213 51.211,20.29 IC1.18 51.211,11.968 v1(51.181,11.938) ; v1@51.109,12.01 ccw(c50.863,12.256) 51.211,12.256
PTC2: IC1.17 R9.1 U1.105 | length 38.1
  Top Layer w0.254: U1.105 43.677,28.713 51.861,20.529 IC1.17 51.861,12.147 v1(52.07,11.938) ; 51.861,12.075 ccw(c52.207,12.075) v1@51.962,11.83 ; 51.861,12.688 ccw(c52.82,12.688) v1@52.142,12.01 ; v1@51.968,11.938 ccw(c51.723,11.938) 51.897,12.111 ccw(c52.07,12.285) v1@52.07,12.04
PTC3: U1.106
PTC4: U1.109
PTC5: U1.110
PTC6: U1.111
PTC7: U1.112
PTC8: U1.113
PTC9: U1.114
PTC11: P9.6 P10.6 R17.1 U1.116 | length 37.2
  Top Layer w0.254: P9.6 -3.556,41.275 -3.2,41.631 14.691,41.631 21.887,34.434 U1.116
  Bottom Layer w0.381: R17.1 P10.6 P9.6
PTC12: U1.117
PTC13: U1.118
PTC14: U1.119
PTC15: U1.120
PTC16: U1.123
PTC17: U1.124
PTC18: U1.125
PTC19: U1.126
PTD0: U1.127
PTD1: P9.3 U1.128 | length 15.7
  Top Layer w0.203: P9.3 5.6,38.469 10.553,38.469 15.887,33.135 U1.128
PTD2: U1.129
PTD3: U1.130
PTD4: U1.131
PTD5: P9.4 U1.132 | length 18
  Top Layer w0.203: P9.4 2.667,38.862 2.667,36.957 3.2,36.424 11.704,36.424 13.887,34.241 U1.132
PTD6: P9.5 U1.133 | length 20.2
  Top Layer w0.203: P9.5 0.254,38.735 0.254,36.703 0.889,36.068 11.557,36.068 13.387,34.238 U1.133
PTD7: U1.136
PTD8: U1.137
PTD9: U1.138
PTD10: U1.139
PTD11: U1.140
PTD12: U1.141
PTD13: U1.142
PTD14: U1.143
PTD15: P11.2 U1.144 | length 8.8
  Top Layer w0.254: P11.2 1.524,33.782 1.905,33.401 7.62,33.401 7.887,33.134 U1.144
PTE0: SD*1.8 U1.1 | length 21.5
  Top Layer w0.152: SD*1.8 -7.393,33.528 1.039,33.528 4.354,30.213 U1.1
PTE1: SD*1.7 U1.2 | length 22.2
  Top Layer w0.152: SD*1.7 -8.637,33.223 0.913,33.223 4.423,29.713 U1.2
PTE2: SD*1.5 U1.3 | length 23.6
  Top Layer w0.152: SD*1.5 -11.432,32.918 0.787,32.918 4.492,29.213 U1.3
PTE3: SD*1.3 U1.4 | length 24.9
  Top Layer w0.152: SD*1.3 -14.227,32.614 0.66,32.614 4.561,28.713 U1.4
PTE4: BT1.1 SD*1.2 U1.7 | length 26
  Top Layer w0.152: SD*1.2 -15.472,32.309 -1.575,32.309 BT1.1 3.521,27.213 U1.7
PTE5: BT1.2 SD*1.1 U1.8 | length 26.8
  Top Layer w0.152: SD*1.1 -16.717,32.004 -3.81,32.004 BT1.2 -0.762,28.956 1.347,28.956 3.59,26.713 U1.8
PTE6: U1.9
PTE7: U1.10
PTE8: BT2.1 U1.11 | length 6.5
  Top Layer w0.254: BT2.1 2.032,27.559 4.378,25.213 U1.11
PTE9: BT2.2 U1.12 | length 9.2
  Top Layer w0.254: BT2.2 -0.762,26.289 2.54,26.289 4.116,24.713 U1.12
PTE10: R4.2 R5.2 U1.13 | length 29.3
  Top Layer w0.254: v1@-10.922,25.044 cw(c-10.922,24.799) -10.749,24.973 cw(c-10.575,25.146) v1@-10.82,25.146 ; v1(-10.922,25.146) -8.636,22.86 2.628,22.86 3.981,24.213 U1.13
  Bottom Layer w0.254: R5.2 R4.2@-17.78,27.559 ; R4.2 -13.392,27.616 v1(-10.922,25.146) ; v1@-11.024,25.146 ccw(c-11.269,25.146) -11.095,25.319 ccw(c-10.922,25.493) v1@-10.922,25.248
PTE11: D6.2 U1.14 | length 10.6
  Top Layer w0.254: D6.2 1.213,17.342 2.159,18.288 2.159,21.816 4.056,23.713 U1.14
PTE12: U1.15
RESET: C23.2 JTAG1.10 R26.1 S4.2 U1.74 | length 34.5
  Top Layer w0.254: v2(11.374,3.556) 13.335,3.556 JTAG1.10 15.494,1.397 25.273,1.397 25.908,2.032 25.908,12.872 26.249,13.213 U1.74 ; S4.2@11.509,3.421 cw(c11.834,3.096) 11.834,3.556 cw(c11.834,4.016) S4.2@11.509,3.691
  Bottom Layer w0.254: C23.2 R26.1 10.174,4.756 v2(11.374,3.556) ; v2@11.184,3.556 ccw(c10.724,3.556) 11.049,3.881 ccw(c11.374,4.206) v2@11.374,3.746
TCK: JTAG1.4 U1.50 | length 15.9
  Top Layer w0.254: v1@14.387,6.858 U1.50 ; 14.387,7.323 ccw(c14.943,7.323) v1@14.55,6.93 ; v1(18.161,6.477) 20.066,6.477 20.574,5.969 20.574,3.937 JTAG1.4 ; v1@18.233,6.405 cw(c18.406,6.232) 18.406,6.477 cw(c18.406,6.722) v1@18.233,6.549
  Bottom Layer w0.254: v1@14.478,6.756 cw(c14.478,6.511) 14.651,6.685 cw(c14.825,6.858) v1@14.58,6.858 ; v1(14.478,6.858) 14.859,6.477 v1(18.161,6.477) ; v1@18.089,6.405 ccw(c17.916,6.232) 17.916,6.477 ccw(c17.916,6.722) v1@18.089,6.549
TDI: JTAG1.8 U1.51 | length 9
  Top Layer w0.254: U1.51 14.887,7.719 15.494,7.112 15.494,3.937 JTAG1.8
TDO: JTAG1.6 U1.52 | length 9.8
  Top Layer w0.254: U1.52 15.387,8.235 18.034,5.588 18.034,3.937 JTAG1.6
TMS: JTAG1.2 U1.53 | length 14.3
  Top Layer w0.254: U1.53 15.887,8.497 17.399,6.985 21.844,6.985 23.114,5.715 23.114,3.937 JTAG1.2
USB0_DM: U1.20
USB0_DP: U1.19
VADJ: C8.1 C13.2 C14.2 C34.1 L1.1 R7.1 S2.2 s3.2 | length 29.6
  Top Layer w1.016: v2(-27.375,2.032) -24.638,2.032 -22.225,4.445 L1.1 ; -22.042,4.628 ccw(c-22.367,4.953) -21.907,4.953 cw(c-22.367,4.953) -22.042,4.628
  Bottom Layer w1.016: C8.1@-22.233,4.818 ccw(c-21.331,5.72) C8.1@-21.331,4.445 ; C8.1@-21.844,4.445 S2.2 s3.2
  other v2: -22.479,4.318 -22.098,4.953
VBAT: pad.0 S1.1 | length 12.1
  Bottom Layer w1.524: pad.0 -50.292,6.096 S1.1 ; pad.0@-53.34,4.536 ccw(c-53.34,8.128) -50.8,5.588 ccw(c-48.26,3.048) pad.0@-51.852,3.048
VCC: C1.1 C7.1 C16.2 F1.1 F2.1 LM*1.1 P2.1 S1.2 S1.3 | length 43.7
  Top Layer w1.524: S1.2 S1.3 -47.498,16.129 C1.1@-47.498,19.812
  Bottom Layer w1.016: S1.3 C16.2@-40.964,13.335 ; P2.1 -46.609,26.543 ; v1(-47.561,20.066) v1(-46.895,20.066) v1(-46.228,20.066) -44.018,17.856 F1.1 ; -46.697,19.868 ccw(c-47.217,20.388) -46.482,20.388 ; -46.482,20.32 F2.1 ; -43.759,13.391 ccw(c-43.622,13.528) C7.1@-43.622,13.335 ; C7.1@-43.5,13.335 ccw(c-43.5,13.528) C7.1@-43.363,13.391 ; C7.1@-42.901,13.391 ccw(c-42.765,13.528) C7.1@-42.765,13.335 ; C7.1@-42.642,13.335 ccw(c-42.642,13.528) C7.1@-42.506,13.391 ; -42.044,13.391 ccw(c-41.908,13.528) -41.908,13.335 ; -41.785,13.335 ccw(c-41.785,13.528) -41.649,13.391 ; C16.2@-40.928,13.335 ccw(c-40.928,13.528) C16.2@-40.792,13.391 ; -46.482,20.005 ccw(c-46.289,20.005) -46.426,19.868 cw(c-46.289,20.005) -46.482,20.005
  other v1: -43.561,13.589 -42.704,13.589 -41.846,13.589 -40.989,13.589 -40.132,13.589 -48.895,20.066 -48.228,20.066
VREGIN: U1.22
pads on no net: P10.3 S1.0 SD*1.10 SD*1.12 SD*1.13 Y1.1
copper on no net:
  other v3: -25.384,40.838

## Polygon pours and split planes (outlines as drawn)
GND on Bottom Layer "Top Layer-GND" (solid, remove dead copper, pour order 6): -57.023,15.24 -48.26,15.24 -48.26,8.89 -45.085,8.89 -45.085,5.334 -45.085,5.08 -41.529,5.08 -41.021,5.08 -41.021,3.81 -41.021,0 -36.957,0 57,0 57,6.477 57,43.688 42.672,43.688 -57,43.688 -57,38.608
GND on Top Layer "Top Layer-GND" (solid, remove dead copper, pour order 8): -57,15.748 -57,15.24 -55.499,15.24 -48.26,15.24 -48.26,12.065 -48.26,8.89 -45.085,8.89 -45.085,5.08 -43.815,5.08 -41.021,5.08 -41.021,3.302 -41.021,0 -37.084,0 57,0 57,11.176 57,43.688 5.588,43.688 -57.15,43.688 -57.15,36.068

## Keep-outs
Keep-Out Layer:
  lines w0.254: -57,0 -57,40.155 cw(c-53.934,40.155) -56.102,42.323 -55.635,42.79 cw(c-53.467,40.622) -53.467,43.688 -52.832,43.688 -28.127,43.688 52.532,43.688 53.594,43.688 cw(c53.594,40.622) 55.762,42.79 56.102,42.45 cw(c53.934,40.282) 57,40.282 57,0 -57,0

## Other copper
Top Layer:
  rectangle net 3.3V: -33.655,33.909 -30.353,35.052
  text "武汉理工大学" at 19.685,41.148 h1.78
  text "晨风" at 31.877,41.148 h1.78
  text "2016" at 23.495,39.243 h1.78 r0.25
  text "张艳松" at 28.375,39.209 h1.27
  text "袁佳威" at 28.325,38.109 h1.27
  text "李锐戈" at 28.35,36.859 h1.27

## Silkscreen, mask and mechanical layers (free items; w line width, h text height)
Top Overlay:
  text "3.3V" at -32.385,42.037 h1.27 r270
  text "C10" at -6.858,41.783 h1.27
  text "C11" at -4.318,41.783 h1.27
  text "D6" at -1.524,41.783 h1.27
  text "D5" at 0.889,41.783 h1.27
  text "D1" at 3.429,41.783 h1.27
  text "GND" at 5.588,41.783 h1.27
  text "3.3V" at 8.255,41.783 h1.27
  text "B23" at 34.163,37.592 h1.27
  text "B20" at 52.578,37.592 h1.27
  text "ADDR" at -2.286,35.56 h1.27
  text "SD" at 0.889,35.56 h1.27
  text "INTB" at 2.921,35.56 h1.27
  text "GND" at 5.715,35.306 h1.27
  text "3.3v" at 7.874,35.306 h1.27
  text "SCL" at -6.858,35.179 h1.27
  text "SDA" at -4.445,35.179 h1.27
  text "B22" at 34.163,34.29 h1.27
  text "B17" at 52.578,34.29 h1.27
  text "GND" at -2.159,32.639 h1.27
  text "D15" at 0.762,32.639 h1.27
  text "3.3V" at 3.175,32.639 h1.27
  text "B21" at 34.163,32.004 h1.27
  text "5V" at -7.62,31.75 h1.27
  text "GND" at -5.461,31.75 h1.27
  text "E5" at -2.54,31.75 h1.27
  text "E4" at 0,31.75 h1.27
  text "5V" at -26.416,28.956 h1.27 r270
  text "GND" at -53.721,28.067 h1.27
  text "VCC" at -51.054,28.067 h1.27
  text "5V" at -7.747,25.146 h1.27
  text "GND" at -5.588,25.146 h1.27
  text "E9" at -2.667,25.146 h1.27
  text "E8" at 0,25.146 h1.27
  text "E10" at -20.701,24.765 h1.27
  text "GND" at -10.287,23.241 h1.27 r90
  text ">" at -2.667,23.114 h1.27 r270
  text ">" at -0.127,23.114 h1.27 r270
  text "B16" at 34.798,21.844 h1.27
  text "3.3V" at -10.287,20.574 h1.27 r90
  text "B17" at 34.798,19.304 h1.27
  text "E24" at -10.287,18.288 h1.27 r90
  text "LED_B" at -3.683,17.272 h1.27 r90
  text "LED_W" at 2.159,17.145 h1.27 r90
  text "B10" at 34.798,16.764 h1.27
  text "E25" at -10.287,16.002 h1.27 r90
  text "E11" at -0.762,15.367 h1.27
  text "GND" at -26.543,14.605 h1.27 r270
  text "B9" at 34.925,14.351 h1.27
  text "E26" at -10.287,13.462 h1.27 r90
  text "E27" at -10.287,10.922 h1.27 r90
  text "E28" at -10.287,8.128 h1.27 r90
  text "0R" at -47.244,8.001 h1.27
  text "3.3V" at 23.495,6.731 h1.27
  text "GND" at -10.287,6.35 h1.27
  text "B18" at 39.751,6.35 h1.27
  text "VCC" at -56.261,5.461 h1.27
  text "3.3V" at 37.211,5.461 h1.27
  text "B19" at 42.291,5.461 h1.27
  text "GND" at 44.704,5.461 h1.27
  text "C1" at 49.149,5.334 h1.27
  text "C2" at 51.562,5.334 h1.27
  text "GND" at 53.975,5.334 h1.27
  text "GND" at -44.45,4.572 h1.27
  text "7.5V" at -10.16,3.937 h1.27
  text "1K" at -33.782,3.175 h1.27
  text "5.1K" at -29.464,3.175 h1.27
  text "0R" at -41.529,1.524 h1.27
  text "A8" at -9.779,1.524 h1.27
  text "A9" at -2.032,1.27 h1.27
  text "220R" at -0.762,1.016 h1.27
  text "0R" at 53.086,0.889 h1.27
Bottom Overlay:
  text "C" at -46.101,36.703 h1.27
  text "C" at -30.861,35.56 h1.27
  text "C" at -28.702,35.56 h1.27
  text "C" at -48.514,35.433 h1.27
  text "10K" at -7.112,35.052 h1.27 r90
  text "C" at 8.128,34.798 h1.27
  text "C" at 8.255,32.766 h1.27
  text "F" at -46.228,32.131 h1.27
  text "0R" at 52.07,29.845 h1.27
  text "1K5" at -20.32,28.448 h1.27
  text "C" at 12.319,28.067 h1.27
  text "C" at 21.463,28.067 h1.27
  text "10K" at -16.764,25.654 h1.27 r270
  text "C" at 12.319,24.892 h1.27
  text "C" at 21.463,24.892 h1.27
  text "C" at -40.132,24.13 h1.27
  text ">" at -2.032,23.114 h1.27 r90
  text "C" at -42.164,22.86 h1.27
  text ">" at 2.667,22.606 h1.27 r270
  text "F" at 0.381,22.479 h1.27
  text "C" at 12.319,21.844 h1.27
  text "C" at 21.463,21.844 h1.27
  text "F" at -40.259,19.05 h1.27
  text "L" at 20.955,18.669 h1.27
  text "C" at 12.319,17.78 h1.27
  text "C" at 2.921,16.891 h1.27
  text "0R" at 43.18,16.764 h1.27 r90
  text "C" at -21.209,15.24 h1.27
  text "C" at -18.796,15.24 h1.27
  text "L" at 2.794,14.859 h1.27
  text "C" at -42.672,14.351 h1.27
  text "C" at -40.513,14.351 h1.27
  text "C" at 21.082,14.224 h1.27
  text "C" at 23.114,14.224 h1.27
  text "10K" at 18.161,13.716 h1.27 r90
  text "C" at 2.921,12.827 h1.27
  text "7.5V" at -26.035,10.541 h1.27 r90
  text "C" at 46.99,10.033 h1.27 r270
  text "10K" at 53.721,9.398 h1.27 r270
  text ">" at -24.892,9.017 h1.27 r270
  text "4.7K" at 40.386,9.017 h1.27
  text "104" at 7.62,5.715 h1.27
  text "10K" at 9.906,5.715 h1.27
  text ">" at -0.762,4.445 h1.27 r90
  text ">" at 1.905,4.445 h1.27 r90
  text "C" at 27.559,3.302 h1.27
  text "C" at -21.463,2.794 h1.27
  text "C" at -19.431,2.794 h1.27
  text "C" at -17.272,2.794 h1.27
  text "C" at -28.194,1.651 h1.27
  text "C" at 38.989,1.016 h1.27 r270
Top Solder:
  drawing of 2348 lines, arcs and shapes, not listed
  text "武汉理工大学" at 36.449,41.021 h1.78
  text "晨风" at 47.371,41.021 h1.78
  text "2016" at 51.308,41.021 h1.78 r0.25
Mechanical 15:
  lines w0.254: -35.5,0 -35.5,43.688 ; -30.5,0 -30.5,43.688 ; 0,-23.495 0,37.343 ; 30.5,0 30.5,43.688 ; 35.5,0 35.5,43.688 ; -39.243,1.778 -39.243,31.496 -10.541,31.496 -10.541,1.778 -39.243,1.778
  lines w1: -59,37.343 59,37.343 ; -59,37.343 -53,47.343 -47.5,57.343 47.5,57.343 53,47.343 59,37.343 ; -59,37.343 -62,27.343 -63,17.343 -63,-3.556 63,-3.556 63,17.343 62,27.343 59,37.343

## Text inside footprints (layer, text, board x,y; h text height)
C1: Top Overlay "+" at -48.138,22.884 h2 r180